# Altium PCB PSU.PcbDoc
Units mm, origin at the board's own origin, x right, y up, seen from the top; angles counter-clockwise.
Board outline 56 x 56 mm, 2 copper layers (Top Layer, Bottom Layer); 46 components, 28 nets, 171 pads, 182 vias.
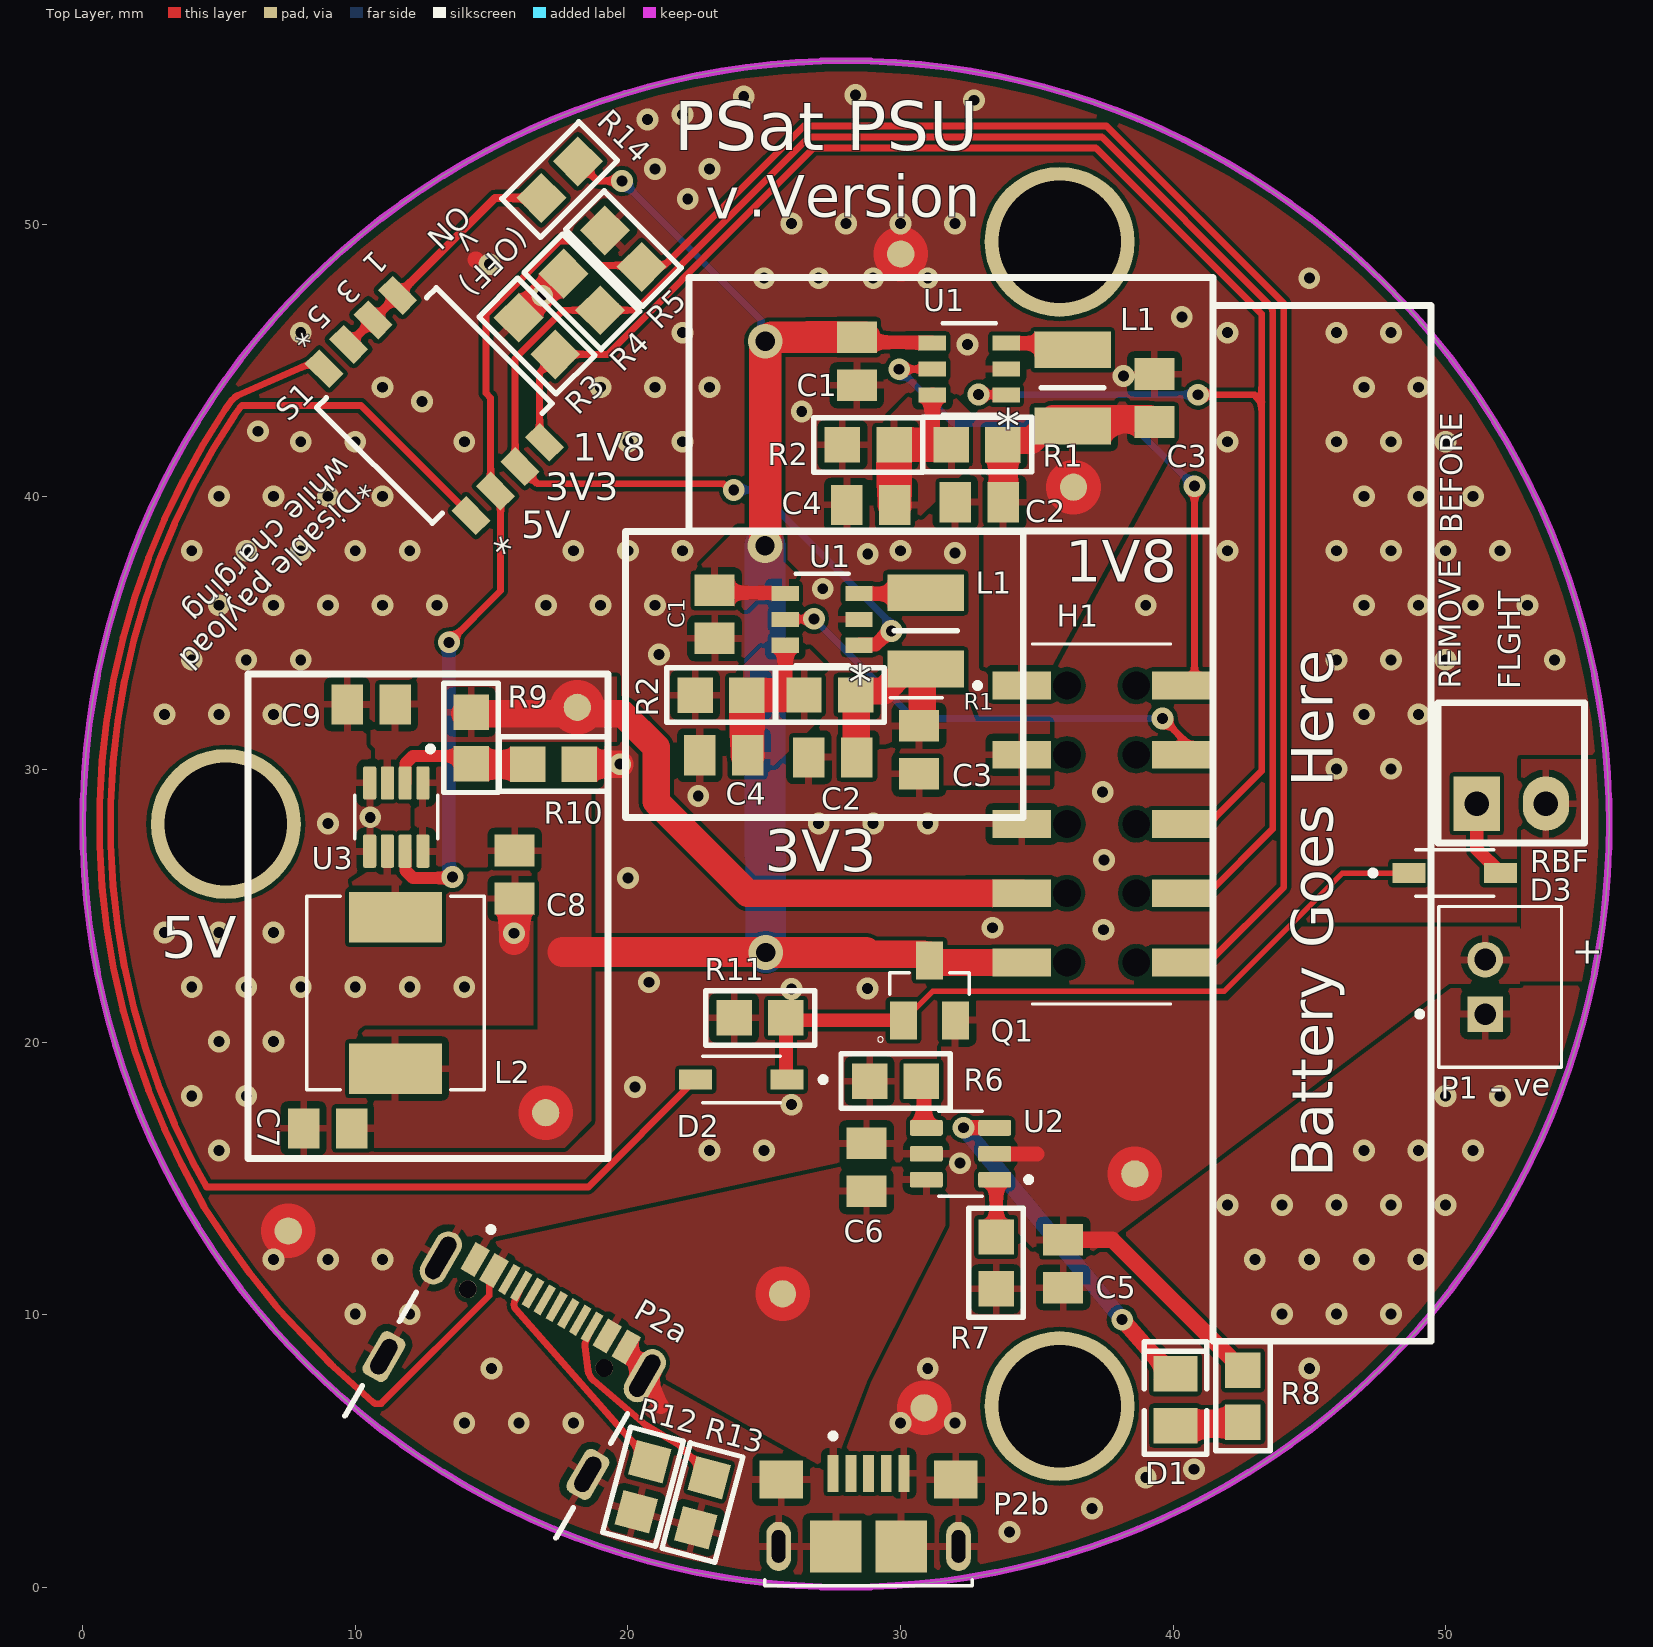
[diagram p0: Top Layer view]
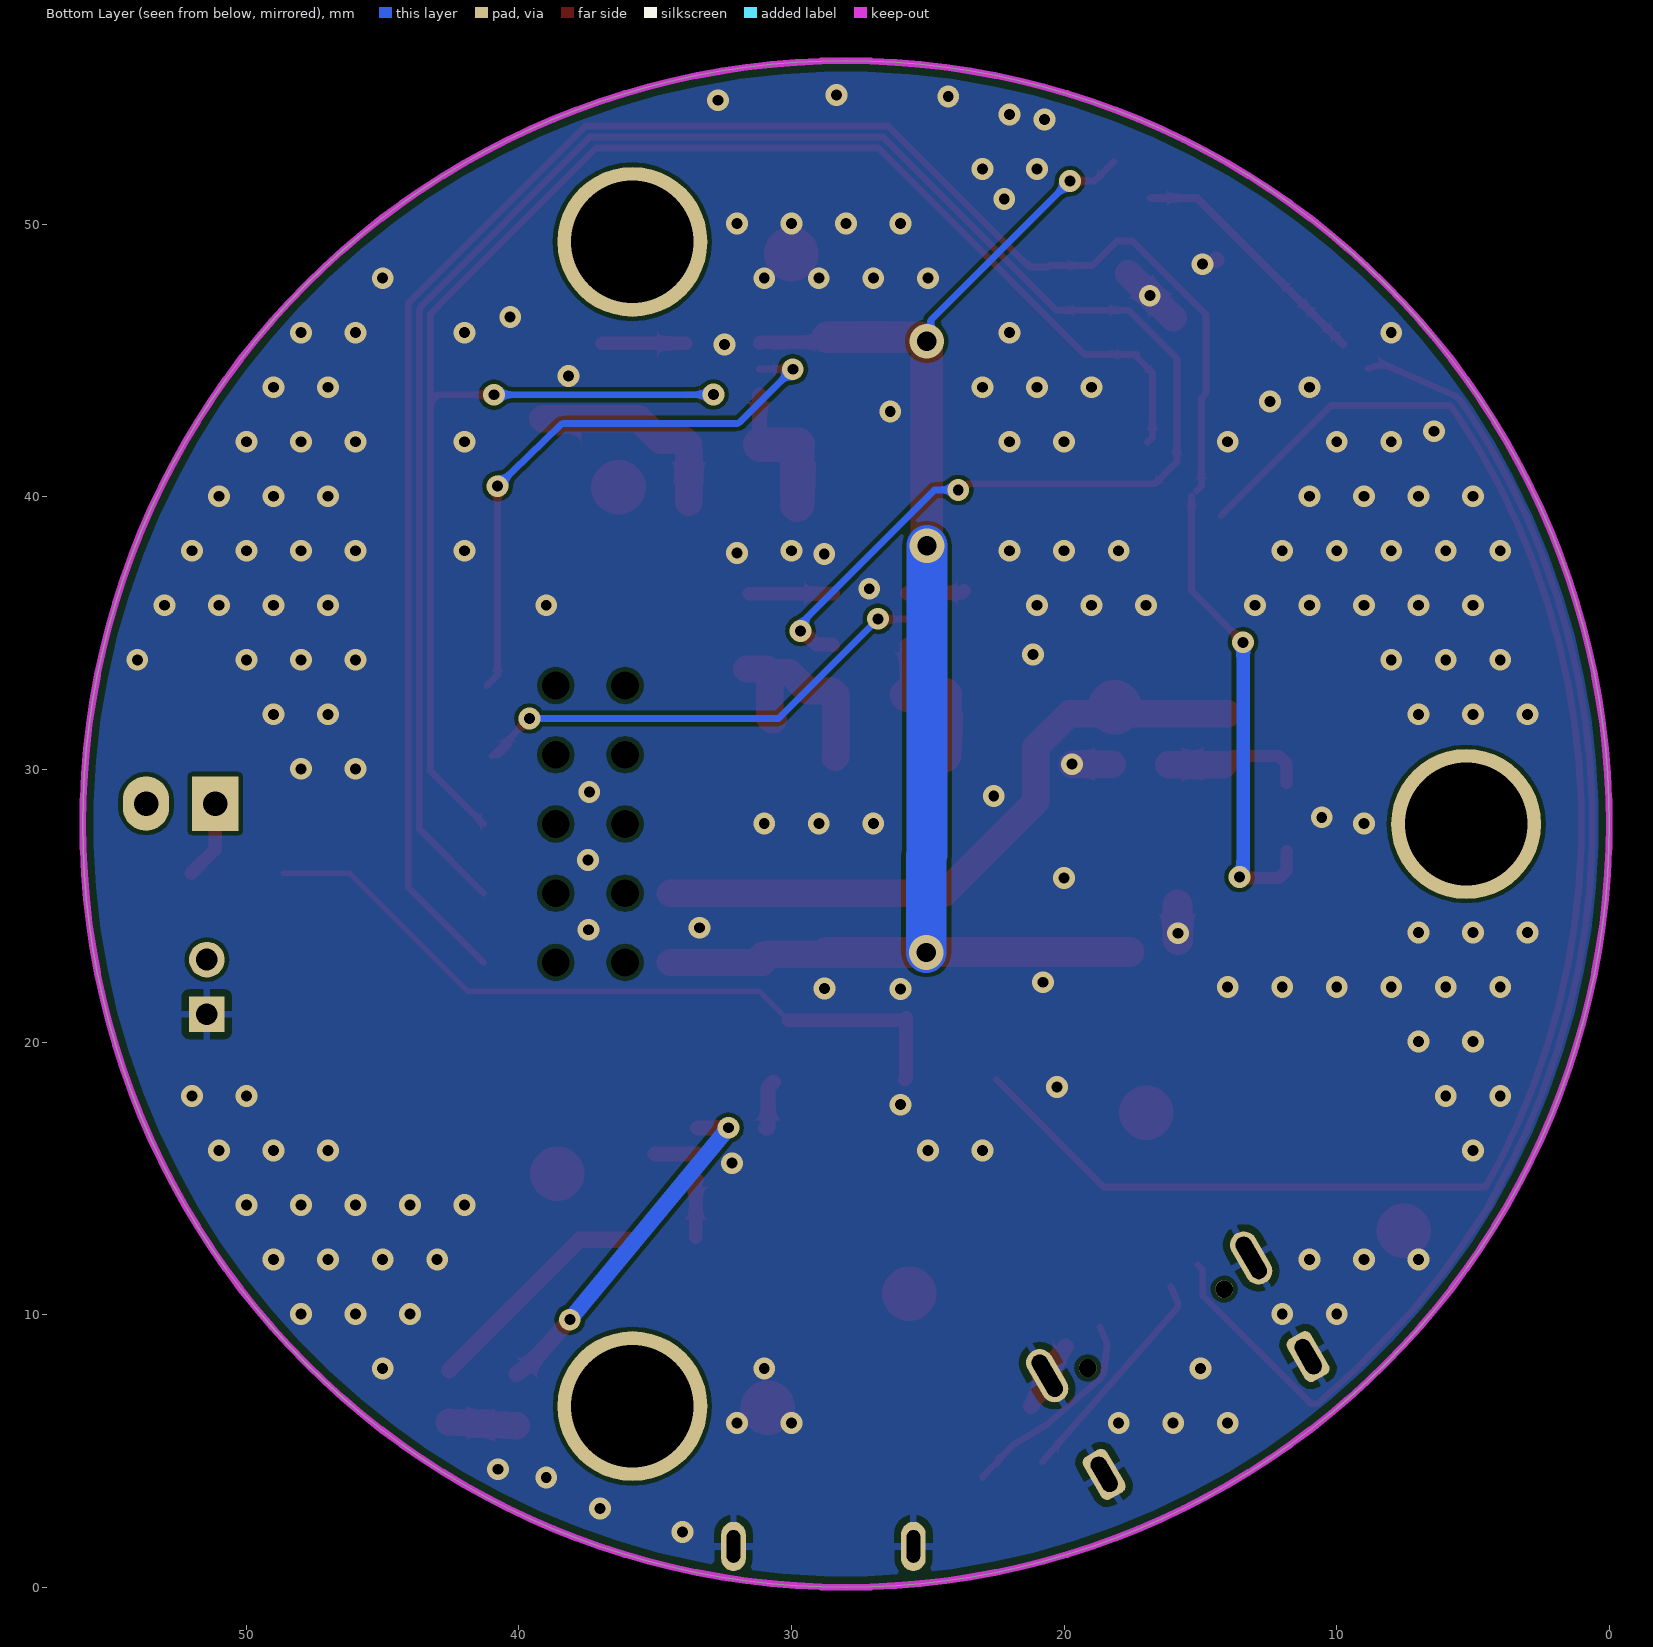
[diagram p1: Bottom Layer view, seen from below]
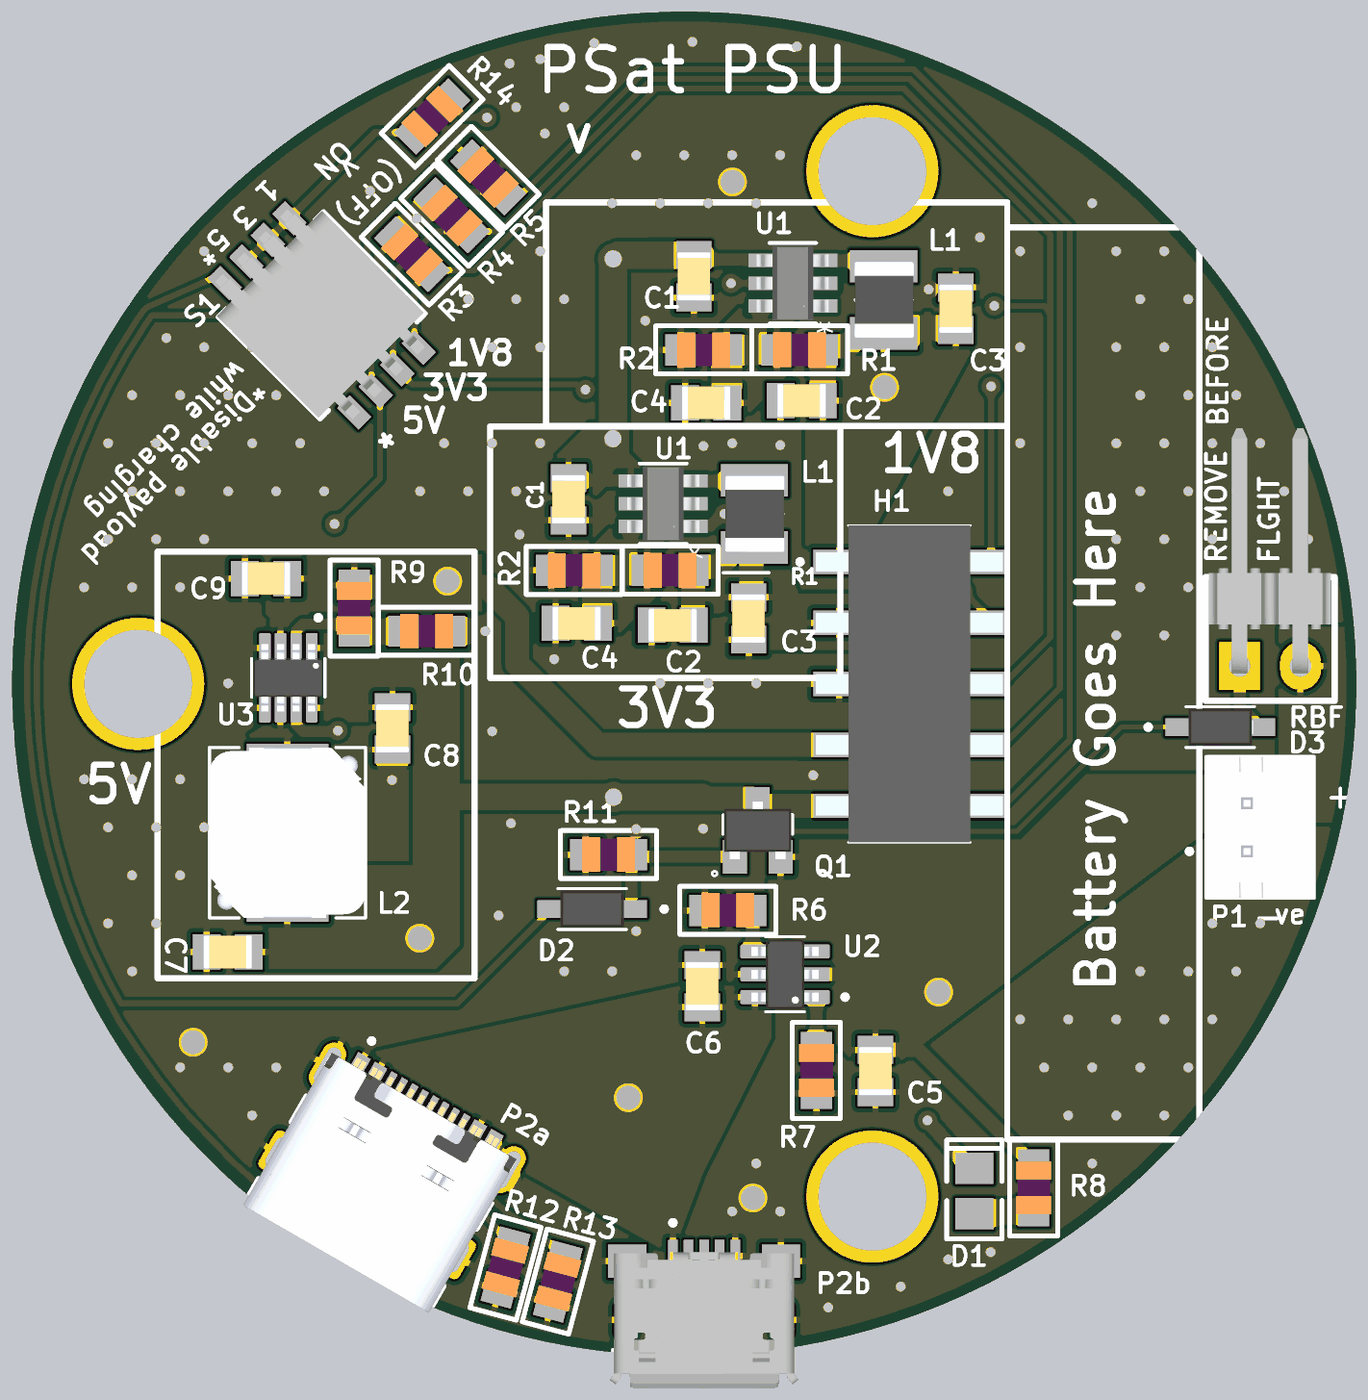
[diagram p2: 3D render of the assembled board from above, using the file's embedded part models]

## Layer stack, top to bottom
Top Solder: solder mask 0.0102, Solder Resist, Dk 3.5
Top Layer: signal copper 0.0356
Dielectric 1: dielectric 0.32, FR-4, Dk 4.8
Bottom Layer: signal copper 0.0356
Bottom Solder: solder mask 0.0102, Solder Resist, Dk 3.5

## Board outline
28,0 cw(c28,28) 0,28 cw(c28,28) 28,56 cw(c28,28) 56,28 cw(c28,28)

## Design rules (kind name [scope] priority, off if disabled: settings)
BoardOutlineClearance [All] p1: gap=0.4 ignorepadtopadclearanceinfootprint=FALSE
Clearance Clearance_1 [All vs InNet('No Net')] p1: gap=0.07 ignorepadtopadclearanceinfootprint=TRUE
Clearance [All] p2: gap=0.152 ignorepadtopadclearanceinfootprint=TRUE except(0: Arc-Hole Track-Hole SMDPad-Hole THPad-Hole Via-Hole Fill-Hole Poly-Hole Region-Hole Text-Hole)
HoleSize [All] p1: absolutevalues=TRUE maxlimit=6 minlimit=0.3 maxpercent=80.000 minpercent=20.000
PolygonConnect ViaDirectConnect [IsVia vs IsPolygon] p1: connectstyle=Direct reliefconductorwidth=0.254 reliefentries=4 polygonreliefangle="90 Angle" airgapwidth=0.254
PolygonConnect [All] p2: connectstyle=Relief reliefconductorwidth=0.254 reliefentries=4 polygonreliefangle="90 Angle" airgapwidth=0.254
RoutingVias [All] p1: holewidth=0.3 width=0.6 viastyle="Through Hole" minholewidth=0.3 minwidth=0.5 maxholewidth=1 maxwidth=5
SolderMaskExpansion [All] p1: expansion=0.102
Width [All] p1: maxlimit=25.4 minlimit=0.152 preferedwidth=0.152
29 further rules are at their usual default settings.

## Classes and differential pairs
component class Main: D2 D3 H1 P1 P2a P2b Q1 R3 R4 R5 R11 R12 R13 R14 RBF S1
component class 3V3: C1 C2 C3 C4 L1 R1 R2 U1
component class 1V8: C1 C2 C3 C4 L1 R1 R2 U1
channel class "Step-down converter": 1V8 3V3
component class "U_Battery charger": C5 C6 D1 R6 R7 R8 U2
component class 5V: C7 C8 C9 L2 R9 R10 U3

## Components (designator, comment, footprint, x,y, rotation, side; value= is the part's Value field where it differs from the comment)
C1 "22uF" CAPC2012X94N 28.4,44.978 r90 top
C1 "22uF" CAPC2012X94N 23.179,35.692 r90 top
C2 "22uF" CAPC2012X94N 32.891,39.804 r0 top
C2 "22uF" CAPC2012X94N 27.517,30.443 r0 top
C3 "22uF" CAPC2012X94N 39.315,43.627 r270 top
C3 "22uF" CAPC2012X94N 30.681,30.723 r90 top
C4 "22pF" CAPC2012X94N 28.914,39.707 r0 top
C4 "22pF" CAPC2012X94N 23.516,30.522 r0 top
C5 "1uF" CAPC2012X94N 35.966,11.873 r90 top
C6 "1uF" CAPC2012X94N 28.751,15.407 r270 top
C7 "22uF" CAPC2012X94N 8.982,16.834 r0 top
C8 "22uF" CAPC2012X94N 15.845,26.147 r270 top
C9 "22uF" CAPC2012X94N 10.578,32.391 r0 top
D1 "LTST-C170KGKT" ECE-LED2012-0805SM 40.086,6.877 r90 top
D2 "1N5819HW-7-F" SOD3715X145N 24.162,18.621 r180 top
D3 "1N5819HW-7-F" SOD3715X145N 50.33,26.2 r0 top
H1 "RS2BE-10-G-SMT" RS2BE10GSMT 37.377,28 r270 top
L1 "DFE322520F-2R2M=P2" INDC3225X200N 36.313,44 r90 top
L1 "DFE322520F-2R2M=P2" INDC3225X200N 30.923,35.082 r90 top
L2 "SPM6530T-1R5M100" IND_SPM6530T-1R5M100 11.472,21.8 r90 top
P1 "B2B-PH-K-S(LF)(SN)" JST_B2B-PH-K-S(LF)(SN) 51.997,22.024 r270 top
P2a "USB4105-GF-A" GCT_USB4105-GF-A 14.789,6.302 r330 top
P2b "10118193-0001LF" AMPHENOL_10118193-0001LF 28.827,1.5 r0 top
Q1 "SSM3J328R,LF" SOT95P240X88-3N 31.063,21.896 r0 top
R1 "200k" 0805 32.807,41.917 r0 top
R1 "910k" 0805 27.41,32.732 r0 top
R2 "100k" 0805 28.814,41.911 r0 top
R2 "200k" 0805 23.416,32.726 r0 top
R3 "1Meg" 0805 16.663,45.901 r135 top value=100k
R4 "1Meg" 0805 18.309,47.52 r135 top value=100k
R5 "1Meg" 0805 19.831,49.106 r135 top value=100k
R6 "560" 0805 29.817,18.565 r0 top
R7 "10k" 0805 33.508,11.899 r90 top
R8 "1.5k" 0805 42.561,7.007 r90 top
R9 "910k" 0805 14.248,31.156 r90 top
R10 "100k" 0805 17.272,30.195 r180 top value=910k
R11 "1Meg" 0805 24.847,20.889 r0 top value=10k
R12 "5k1" 0805 20.554,3.688 r255 top value=100k
R13 "5k1" 0805 22.734,3.104 r75 top value=100k
R14 "1.5k" 0805 17.494,51.637 r225 top
RBF "" ECE-600102STTH-RA 51.139,28.748 r90 top
S1 "TDP04H1SBD1" TDP04H1SBD1 12.899,43.352 r225 top
U1 "AP3445LW6-7" SOT26_AP3445_DIO 32.521,44.691 r180 top
U1 "AP3445LW6-7" SOT26_AP3445_DIO 27.124,35.506 r180 top
U2 "BQ21040DBVR" SOT95P280X145-6N 32.201,15.902 r180 top
U3 "RT4812GJ8F" SOT65P279X100-8N 11.502,28.255 r270 top

## Footprints (in the part's own frame and the unit in brackets; to place one, negate y for a bottom-side part, rotate by r counter-clockwise, add the part's x,y. Pads: shape width x height; smd on the part's side, far side on the other; paste and mask are expansions set on the pad)
0805 [mm]
  rect 1.3x1.3 smd: 1(-0.95,0) 2(0.95,0)
  silkscreen extent -2,-1 2,1, body extent -1.1,-0.72 1.1,0.73, height 1.1
AMPHENOL_10118193-0001LF [mm]
  rect 0.4x1.35 smd: 1(-1.3,2.675) 2(-0.65,2.675) 3(0,2.675) 4(0.65,2.675) 5(1.3,2.675)
  rect 1.6x1.4 smd: S1(-3.2,2.45) S2(3.2,2.45)
  rect 1.9x1.9 smd: S3(1.2,0) S4(-1.2,0)
  oval 0.9x1.8 hole 0.5 slot 1.2 at 90 deg: S5(-3.3,0) S6(3.3,0)
  silkscreen extent -3.8,-1.45 3.8,4.15, body extent -3.94,-2.83 3.93,2.83, height 2.85
CAPC2012X94N [mm]
  rect 1.16x1.47 smd: 1(-0.88,0) 2(0.88,0)
  body extent -1.02,-0.7 1.02,0.7, height 1.23
ECE-600102STTH-RA [mm] "Polarised Header 2 way"
  rect 2x1.7 hole 0.9: 1(0,0)
  oval 2x1.7 hole 0.9: 2(0,-2.54)
  silkscreen extent -1.45,-3.96 3.7,1.42, body extent -0.31,-3.8 9.91,1.28, height 1.9
ECE-LED2012-0805SM [mm] "RED AS AlGaAs SMD LED, Body; 2mm x 1.25 mm (LxW)"
  rect 1.3x1.6 smd: 1(-0.95,0) 2(0.95,0)
  silkscreen extent -2,-1.15 2.13,1.15
GCT_USB4105-GF-A [mm]
  rect 0.6x1.15 smd: A1_B12(-3.2,4.755) A4_B9(-2.4,4.755) B1_A12(3.2,4.755) B4_A9(2.4,4.755)
  rect 0.3x1.15 smd: A5(-1.25,4.755) A6(-0.25,4.755) A7(0.25,4.755) A8(1.25,4.755) B5(1.75,4.755) B6(0.75,4.755) B7(-0.75,4.755) B8(-1.75,4.755)
  oval 1x2.1 hole 0.6 slot 1.7 at 90 deg: SH1(-4.32,4.18) SH2(4.32,4.18)
  rrect50% 1x1.8 hole 0.6 slot 1.4 at 90 deg: SH3(-4.32,0) SH4(4.32,0)
  round 0.65 hole 0.65 unplated: ""(-2.89,3.68) ""(2.89,3.68)
  silkscreen extent -4.47,-2.6 4.47,6.1, body extent -4.47,-2.6 4.47,5.11, height 3.31
IND_SPM6530T-1R5M100 [mm]
  rect 1.85x3.4 smd: 1(-2.775,0) 2(2.775,0)
  silkscreen extent -3.55,-3.25 3.55,3.25, body extent -3.55,-3.25 3.55,3.25, height 3
INDC3225X200N [mm]
  rect 1.35x2.8 smd: 1(-1.4,0) 2(1.4,0)
  silkscreen extent 0,-1.15 0,1.15, body extent -1.6,-1.27 1.6,1.23, height 2
JST_B2B-PH-K-S(LF)(SN) [mm]
  rect 1.308x1.308 hole 0.8: 1(1,-0.55)
  round 1.308 hole 0.8: 2(-1,-0.55)
  silkscreen extent -2.95,-3.05 2.95,2.25, body extent -2.95,-2.25 2.95,2.25, height 6
RS2BE10GSMT [mm]
  rect 1.02x2.15 smd: 1(-5.08,-2.925) 2(-5.08,2.925) 3(-2.54,-2.925) 4(-2.54,2.925) 5(0,-2.925) 6(0,2.925) 7(2.54,-2.925) 8(2.54,2.925) 9(5.08,-2.925) 10(5.08,2.925)
  round 0.51 hole 1.02 unplated: MH1(-5.08,-1.27) MH2(-5.08,1.27) MH3(-2.54,1.27) MH4(-2.54,-1.27) MH5(0,-1.27) MH6(0,1.27) MH7(2.54,1.27) MH8(2.54,-1.27) MH9(5.08,-1.27) MH10(5.08,1.27)
  silkscreen extent -6.6,-4.6 6.6,2.54, body extent -6.6,-3.9 6.6,3.9, height 5.15
SOD3715X145N [mm]
  rect 1.21x0.73 smd: A(1.68,0) C(-1.68,0)
  silkscreen extent -3.1,-0.85 1.43,0.85, body extent -1.83,-0.77 1.83,0.77, height 0.8
SOT26_AP3445_DIO [mil]
  rect 39.5x22 smd paste+0 mask+0: 1(-53.25,37.4) 2(-53.25,0) 3(-53.25,-37.4) 4(53.25,-37.4) 5(53.25,0) 6(53.25,37.4)
  silkscreen extent -39,-66 39,66, body extent -59,-61 59,61, height 55
SOT65P279X100-8N [mm]
  rrect25% 1.22x0.48 smd: 1(-1.25,0.975) 2(-1.25,0.325) 3(-1.25,-0.325) 4(-1.25,-0.975) 5(1.25,-0.975) 6(1.25,-0.325) 7(1.25,0.325) 8(1.25,0.975)
  silkscreen extent -2.6,-1.53 0.8,1.53, body extent -1.4,-1.45 1.4,1.45, height 1
SOT95P240X88-3N [mm]
  rect 1x1.4 smd: 1(-0.95,-1.1) 2(0.95,-1.1) 3(0,1.1)
  silkscreen extent -1.9,-1.9 1.45,0.65, body extent -1.4,-1.2 1.4,1.2, height 0.88
SOT95P280X145-6N [mm]
  rrect25% 1.21x0.58 smd: 1(-1.255,0.95) 2(-1.255,0) 3(-1.255,-0.95) 4(1.255,-0.95) 5(1.255,0) 6(1.255,0.95)
  silkscreen extent -2.6,-1.56 0.8,1.56, body extent -1.4,-1.45 1.4,1.45, height 1.45
TDP04H1SBD1 [mm]
  rect 0.76x1.27 smd: 1(-1.905,-3.81) 2(-0.635,-3.81) 3(0.635,-3.81) 4(1.905,-3.81) 5(1.905,3.81) 6(0.635,3.81) 7(-0.635,3.81) 8(-1.905,3.81)
  silkscreen extent -3.11,-3 3.11,3, body extent -3.08,-4.14 3.12,3.98, height 4.36

## Part data
C1 C1 C2 C2 C3 C3 C4 C4 C5 C6 C7 C8 C9: library part "CAP 0805", "No Description Available", IsInLabBook=Yes
D1: library part LED, "LED"
D2 D3: "Diode Schottky 40 V 1A Surface Mount SOD-123", Package="SOD-123 Fairchild Semiconductor", Availability="In Stock", Check_prices=https://www.snapeda.com/parts/1N5819HW-7-F/Diodes+Inc./view-part/?ref=eda, MF="Diodes Inc.", MP=1N5819HW-7-F, Price=None, Purchase-URL=https://pricing.snapeda.com/search/part/1N5819HW-7-F/?ref=eda, SnapEDA_Link=https://www.snapeda.com/parts/1N5819HW-7-F/Diodes+Inc./view-part/?ref=snap
H1: "Receptacle Strip 10P 2.54mm Pitch SMT", Manufacturer_Name="Adam Tech", Geometry.Height=5.05mm, Manufacturer_Part_Number=RS2BE-10-G-SMT
L1 L1: "2.2 H Shielded Wirewound Inductor 3.3 A 40mOhm Max 1210 (3225 Metric)", Manufacturer_Name="Murata Electronics", Manufacturer_Part_Number=DFE322520F-2R2M=P2, Datasheet Link=https://www.murata.com/-/media/webrenewal/support/library/catalog/products/inductor/chip/o05e.ashx?la=en-us, Geometry.Height=2mm
L2: "1.5 µH Shielded Drum Core, Wirewound Inductor 11 A 10.67mOhm Max Nonstandard", Package="NON STANDARD-2 TDK", Check_prices=https://www.snapeda.com/parts/SPM6530T-1R5M100/TDK/view-part/?ref=eda, Digi-Key_Part_Number=445-3881-2-ND, MF=TDK, MP=SPM6530T-1R5M100, Purchase-URL=https://pricing.snapeda.com/search/part/SPM6530T-1R5M100/?ref=eda, SnapEDA_Link=https://www.snapeda.com/parts/SPM6530T-1R5M100/TDK/view-part/?ref=snap
P1: "Connector Header Through Hole 2 position 0.079 (2.00mm)", Package=None, Check_prices=https://www.snapeda.com/parts/B2B-PH-K-S%20(LF)(SN)/JST/view-part/?ref=eda, MF=JST, MP="B2B-PH-K-S (LF)(SN)", SnapEDA_Link=https://www.snapeda.com/parts/B2B-PH-K-S%20(LF)(SN)/JST/view-part/?ref=snap
P2a: "USB-C (USB TYPE-C) USB 2.0 Receptacle Connector 24 (16+8 Dummy) Position Surface Mount, Right Angle; Through Hole", Package=None, Check_prices=https://www.snapeda.com/parts/USB4105-GF-A/Global+Connector+Technology/view-part/?ref=eda, MF=GCT, MP=USB4105-GF-A, SnapEDA_Link=https://www.snapeda.com/parts/USB4105-GF-A/Global+Connector+Technology/view-part/?ref=snap
P2b: "Micro USB 2.0, Input Output Connectors, B TYPE RECEPTACLE", Package=None, Availability="In Stock", Check_prices=https://www.snapeda.com/parts/10118193-0001LF/Amphenol+FCI/view-part/?ref=eda, MF="Amphenol ICC", MP=10118193-0001LF, Price=None, Purchase-URL=https://pricing.snapeda.com/search/part/10118193-0001LF/?ref=eda, SnapEDA_Link=https://www.snapeda.com/parts/10118193-0001LF/Amphenol+FCI/view-part/?ref=snap
Q1: "P-Channel 20V 6A _Ta_ 1W _Ta_ Surface Mount SOT-23F", Package="SOT-23 Toshiba", Availability=Unavailable, MF=Toshiba, MP=SSM3J328R,LF, Price=None, SnapEDA_Link=https://www.snapeda.com/parts/SSM3J328R,LF/Toshiba%20Semiconductor%20and%20Storage/view-part/214715/?ref=snap
R1 R1 R2 R2 R3 R4 R5 R6 R7 R8 R9 R10 R11 R12 R13 R14: library part "Res 0805", "Resistor"
  R1 R1 R2 R2 R9 R10: IsInLabBook=Check
  R3 R4 R5 R6 R7 R8 R11 R12 R13 R14: IsInLabBook=Yes
RBF: library part "Header 2", "Short Before Flight"
S1: "Switch", Manufacturer_Name="C & K COMPONENTS", Mouser Part Number=611-TDP04H1SBD1, Arrow Part Number=TDP04H1SBD1, Arrow Price/Stock=https://www.arrow.com/en/products/tdp04h1sbd1/ck?region=nac, Datasheet Link=https://www.ckswitches.com/media/1330/tdp.pdf, Height=4.4mm, Manufacturer_Part_Number=TDP04H1SBD1, Mouser Price/Stock=https://www.mouser.co.uk/ProductDetail/CK/TDP04H1SBD1?qs=LUL%252B3%2F1oFk7o6Dk5%252BAVXHw%3D%3D
U1 U1: "No Description Available", Mfr_Name="Diodes Inc", Copyright="Copyright (C) 2024 Ultra Librarian. All rights reserved.", Manufacturer_Part_Number=AP3445LW6-7, RefDes=RefDes, Type=DEV
U2: "1-cell, 0.8-A Li-ion and Li-polymer battery charger", Package="SOT-23-6 Texas Instruments", Availability="In Stock", Check_prices=https://www.snapeda.com/parts/BQ21040DBVR/Texas+Instruments/view-part/?ref=eda, MF="Texas Instruments", MP=BQ21040DBVR, Price=None, Purchase-URL=https://pricing.snapeda.com/search/part/BQ21040DBVR/?ref=eda, SnapEDA_Link=https://www.snapeda.com/parts/BQ21040DBVR/Texas+Instruments/view-part/?ref=snap
U3: "Boost Switching Regulator IC Positive Adjustable 1.8V 1 Output 2A SOT-23-8 Thin, TSOT-23-8", Package="TSOT-23 Richtek", Availability=Unavailable, DigiKey-Purchase-URL=https://snapeda.com/shop?store=DigiKey&id=699858, MF="Richtek USA", MP=RT4812GJ8F, Price=None, SnapEDA_Link=https://www.snapeda.com/parts/RT4812GJ8F/Richtek%20USA%20Inc./view-part/699858/?ref=snap

## Free pads (board coordinates)
  round 5.5 hole 4.5: 1(5.25,28) 1(35.837,6.643) 1(35.837,49.357)
  round 1 smd: 2(7.539,13.071) 2(16.983,17.408) 2(18.143,32.278) 2(25.672,10.763) 2(30.009,48.91) 2(30.863,6.584) 2(36.345,40.354) 2(38.597,15.163)

## Via types
v1: diameter 0.8, hole 0.4, Top Layer to Bottom Layer, tented both sides, 158 vias
v2: diameter 0.8, hole 0.4, Top Layer to Bottom Layer, tented bottom, 21 vias
v3: diameter 1.27, hole 0.711, Top Layer to Bottom Layer, tented bottom, 3 vias

## Nets (pads, with @x,y where several pads share a name; then routed paths per layer and width w, separated by ;. In a path a pad name is that pad's centre, name@x,y a point inside that pad or via, vN(x,y) a via of type N, cw(c..) or ccw(c..) an arc to the next point about the centre after c; other vN are vias at no path point)
1V8: C2.2@33.771,39.804 C3.2@39.315,42.747 H1.1 L1.1@36.313,42.6 pad.2@36.345,40.354 R1.2@33.757,41.917 | length 7.9
  Top Layer w1: C2.2@33.771,39.804 33.764,39.81 33.764,41.91 33.757,41.917 33.907,42.067 34.795,42.067 35.596,42.867 36.321,42.867 36.323,42.865 39.131,42.865 C3.2@39.133,42.863
1V8_PG: H1.2 U1.5@31.169,44.691 | length 21.3
  Top Layer w0.25: v2(29.951,44.684) 29.955,44.687 31.165,44.687 U1.5@31.169,44.691 ; v2(40.785,40.393) 40.785,33.465 H1.2@41.17,33.08
  Bottom Layer w0.25: v2(29.951,44.684) 31.87,42.765 ccw(c32.047,42.942) 32.047,42.692 38.324,42.692 cw(c38.324,42.442) 38.499,42.621 v2(40.785,40.393)
3V3: C2.2@28.397,30.443 C3.2@30.681,31.603 H1.3 L1.1@30.923,33.682 R1.2@28.36,32.732 | length 7.8
  Top Layer w1: C2.2@28.397,30.443 28.379,30.462 28.379,32.75 28.51,32.882 29.398,32.882 30.073,33.557 L1.1@30.798,33.557 ; C3.2@30.673,31.814 30.718,31.814 30.798,31.894 L1.1@30.798,33.557 ; L1.1@31.648,33.682 30.923,33.682 L1.1@30.798,33.557
3V3_PG: H1.4 U1.5@25.771,35.506 | length 18.1
  Top Layer w0.25: U1.5@25.771,35.506 25.781,35.516 26.816,35.516 v2(26.827,35.527) ; v2(39.61,31.875) H1.4@40.944,30.54 ; H1.4@40.352,30.925 40.737,30.54 H1.4@40.944,30.54 ; H1.4@40.982,30.502 H1.4@40.944,30.54
  Bottom Layer w0.25: v2(26.827,35.527) 30.479,31.875 v2(39.61,31.875)
5V: C9.2 H1.7 pad.2@18.143,32.278 R9.2 U3.3 | length 24.3
  Top Layer w1: R9.2@14.007,32.047 19.801,32.047 21.037,30.812 21.037,28.821 24.398,25.46 H1.7
EN_1V8: H1.6 R3.1 S1.8 U1.1@33.874,43.741 | length 66.2
  Top Layer w0.25: S1.8 16.76,42.186 16.76,44.561 17.334,45.136 R3.1 19.243,45.229 24.677,50.664 26.815,52.801 37.164,52.801 42.617,47.348 43.25,46.715 43.25,43.481 ; v2(32.86,43.755) 32.867,43.748 33.867,43.748 U1.1@33.874,43.741 ; v2(40.917,43.746) 42.985,43.746 43.007,43.724 43.25,43.481 ; H1.6@41.302,28 43.25,29.948 43.25,33.045 43.25,43.481
  Bottom Layer w0.25: v2(32.86,43.755) v2(40.917,43.746)
EN_3V3: H1.8 R4.1 S1.7 U1.1@28.476,34.556 | length 77.6
  Top Layer w0.25: v2(23.881,40.257) 23.732,40.257 23.51,40.479 16.67,40.479 S1.7 15.862,41.288 15.862,45.073 17.637,46.848 R4.1 20.292,46.848 26.648,53.204 37.384,53.204 43.522,47.066 cw(c43.205,46.749) 43.653,46.749 43.653,27.811 H1.8@41.302,25.46
  Top Layer w0.5: U1.1@28.476,34.556 28.506,34.586 29.095,34.586 29.592,35.082 v2(29.673,35.082)
  Bottom Layer w0.25: v2(23.881,40.257) 24.749,40.257 v2@29.616,35.39
EN_5V: H1.10 R5.1 S1.6 U3.7 | length 85
  Top Layer w0.25: v2(13.431,34.664) 15.324,36.557 S1.6@15.324,40.029 ; S1.6 14.964,40.39 14.964,43.634 14.794,43.804 14.794,46.688 17.495,49.388 18.06,49.388 18.957,48.492 20.534,48.492 20.591,48.435 21.245,48.435 21.302,48.492 21.338,48.492 22.92,50.074 23.926,51.08 26.452,53.606 37.553,53.606 44.062,47.097 44.062,25.68 H1.10@41.302,22.92
  Top Layer w0.45: U3.7 11.842,26.99 11.842,26.291 12.116,26.017 13.534,26.017 v2(13.57,26.053)
  Bottom Layer w0.5: v2(13.431,34.664) 13.431,26.272 13.57,26.134 v2(13.57,26.053)
FB_1V8: C4.2@29.794,39.707 R1.1@31.857,41.917 R2.2@29.764,41.911 U1.6@31.169,43.741 | length 5.4
  Top Layer w0.5: 31.158,41.914 31.169,41.924
  Top Layer w0.55: 31.169,41.924 U1.6@31.169,43.741
  Top Layer w1.25: C4.2@29.794,39.707 29.779,39.721 29.779,41.896 29.764,41.911 29.767,41.914 31.158,41.914
FB_3V3: C4.2@24.396,30.522 R1.1@26.46,32.732 R2.2@24.366,32.726 U1.6@25.771,34.556 | length 5.4
  Top Layer w0.5: 25.761,32.729 25.771,32.739
  Top Layer w0.55: 25.771,32.739 U1.6@25.771,34.556
  Top Layer w1.25: C4.2@24.396,30.522 24.381,30.537 24.381,32.711 24.366,32.726 24.369,32.729 25.761,32.729
GND: C1.1 C2.1 C3.1 C4.1 C5.1 C6.1 C7.1 C8.2 C9.1 H1.5 P1.1 P2a.A1_B12 P2a.B1_A12 P2a.SH1 P2a.SH2 P2a.SH3 P2a.SH4 P2b.5 P2b.S1 P2b.S2 P2b.S3 P2b.S4 P2b.S5 P2b.S6 pad.2@7.539,13.071 pad.2@30.009,48.91 pad.2@30.863,6.584 R2.1 R3.2 R4.2 R5.2 R6.1 R7.1 R10.1 R11.1 R12.2 R13.1 U1.2 U2.5 U3.4 U3.5 | length 7.6
  Top Layer w0.6: 14.411,48.704 14.424,48.704 ; P2a.B1_A12 P2a.SH2 21.212,6.653
  Top Layer w1: R3.2 16.005,46.573 17.623,48.191 R4.2 ; R10.1 v1(19.707,30.195)
  Top Layer w1.1: v1@15.816,23.752 15.831,23.767 15.831,25.024 C8.2@15.848,25.04
  other v1: 33.997,2.024 37.019,2.894 38.997,4.024 40.768,4.329 13.997,6.024 15.997,6.024 17.997,6.024 29.997,6.024 31.997,6.024 14.997,8.024 30.997,8.024 44.997,8.024 9.997,10.024 11.997,10.024 43.997,10.024 45.997,10.024 47.997,10.024 6.997,12.024 8.997,12.024 10.997,12.024 42.997,12.024 44.997,12.024 46.997,12.024 48.997,12.024 41.997,14.024 43.997,14.024 45.997,14.024 47.997,14.024 49.997,14.024 4.997,16.024 22.997,16.024 24.997,16.024 46.997,16.024 48.997,16.024 50.997,16.024 25.997,17.704 3.997,18.024 5.997,18.024 49.997,18.024 51.997,18.024 20.263,18.353 4.997,20.024 6.997,20.024 25.997,21.95 28.786,21.968 3.997,22.024 5.997,22.024 7.997,22.024 9.997,22.024 11.997,22.024 13.997,22.024 20.778,22.193 15.823,23.993 2.997,24.024 4.997,24.024 6.997,24.024 33.372,24.194 19.997,26.024 8.997,28.024 26.997,28.024 28.997,28.024 30.997,28.024 22.58,29.028 45.997,30.024 47.997,30.024 2.997,32.024 4.997,32.024 6.997,32.024 46.997,32.024 48.997,32.024 3.997,34.024 5.997,34.024 7.997,34.024 45.997,34.024 47.997,34.024 49.997,34.024 53.997,34.024 21.137,34.219 4.997,36.024 6.997,36.024 8.997,36.024 10.997,36.024 12.997,36.024 16.997,36.024 18.997,36.024 20.997,36.024 38.997,36.024 46.997,36.024 48.997,36.024 50.997,36.024 52.997,36.024 28.798,37.908 31.999,37.946 3.997,38.024 5.997,38.024 7.997,38.024 9.997,38.024 11.997,38.024 17.997,38.024 19.997,38.024 21.997,38.024 29.997,38.024 41.997,38.024 45.997,38.024 47.997,38.024 49.997,38.024 51.997,38.024 4.997,40.024 6.997,40.024 8.997,40.024 10.997,40.024 46.997,40.024 48.997,40.024 50.997,40.024 7.997,42.024 9.997,42.024 13.997,42.024 19.997,42.024 21.997,42.024 41.997,42.024 45.997,42.024 47.997,42.024 49.997,42.024 6.425,42.409 26.375,43.13 10.997,44.024 18.997,44.024 20.997,44.024 22.997,44.024 46.997,44.024 48.997,44.024 38.182,44.432 7.997,46.024 21.997,46.024 41.997,46.024 45.997,46.024 47.997,46.024 40.319,46.599 24.997,48.024 26.997,48.024 28.997,48.024 30.997,48.024 44.997,48.024 14.917,48.538 25.997,50.024 27.997,50.024 29.997,50.024 31.997,50.024 22.194,50.924 20.997,52.024 22.997,52.024 20.722,53.841 21.997,54.024 32.699,54.552 24.248,54.691 28.343,54.743
  other v2: 32.185,15.558 37.445,24.121 37.46,26.684 10.547,28.245 37.416,29.171 27.147,36.631 12.447,43.498 32.458,45.592 16.854,47.382
NetC6_2: C6.2 P2a.A4_B9 P2a.B4_A9 P2b.1 pad.2@25.672,10.763 S1.4 U2.6 | length 51.6
  Top Layer w0.25: S1.4 8.317,44.88 5.684,43.721 ccw(c5.846,43.352) 5.562,43.637 5.474,43.549 ccw(c5.758,43.264) 5.43,43.497 5.237,43.225 5.235,43.223 5.23,43.215 4.412,41.914 3.669,40.57 3.666,40.563 3.003,39.186 3,39.179 2.415,37.766 1.908,36.316 1.482,34.84 1.14,33.343 0.883,31.828 0.711,30.302 0.625,28.768 0.625,27.232 0.711,25.698 0.883,24.172 1.14,22.657 1.482,21.16 1.908,19.684 2.415,18.234 3,16.821 3.003,16.814 3.624,15.511 4.458,13.939 5.234,12.78 6.118,11.532 7.076,10.331 7.44,9.924 9.117,8.17 9.191,8.095 10.66,6.782 10.733,6.729 10.94,6.729 11.004,6.792 14.913,10.701 14.913,11.645 P2a.A4_B9@15.088,11.82
NetD1_1: D1.1 R8.1 | length 2.5
  Top Layer w1: D1.1 R8.1
NetD1_2: D1.2 U2.3 | length 13.1
  Top Layer w0.55: v2@32.315,16.854 U2.3@33.455,16.854
  Top Layer w0.6: v2(32.313,16.856) v2@32.315,16.854 ; v2(38.132,9.816) 39.586,8.177 D1.2
  Bottom Layer w0.6: v2(32.313,16.856) v2(38.132,9.816)
NetD2_A: D2.A S1.5 | length 59.9
  Top Layer w0.25: S1.5 10.278,43.279 10.205,43.352 5.846,43.352 5.758,43.264 5.564,42.991 4.875,41.895 4.759,41.71 4.027,40.385 3.37,39.021 2.791,37.623 2.291,36.194 1.872,34.74 1.535,33.264 1.282,31.772 1.112,30.268 1.027,28.757 1.027,27.243 1.112,25.732 1.282,24.228 1.535,22.736 1.872,21.26 2.291,19.806 2.791,18.377 3.37,16.979 4.027,15.615 4.539,14.688 18.549,14.688 D2.A
NetD2_C: D2.C D3.C Q1.1 R11.2 | length 27.4
  Top Layer w0.2: Q1.1 31.182,21.864 41.873,21.864 46.209,26.2 D3.C
  Top Layer w0.5: D2.C 25.797,18.666 R11.2 25.891,20.796 Q1.1
NetD3_A: D3.A RBF.1 | length 2.9
  Top Layer w0.5: RBF.1 51.139,27.071 D3.A
NetL1_1V8_2: L1.2@36.313,45.4 U1.3@33.874,45.641 | length 3.1
  Top Layer w0.5: U1.3@33.874,45.641 33.879,45.636 36.946,45.636 L1.2@36.951,45.631
NetL1_3V3_2: L1.2@30.923,36.482 U1.3@28.476,36.456 | length 3.1
  Top Layer w0.5: U1.3@28.476,36.456 28.481,36.451 31.548,36.451 L1.2@31.553,36.446
NetL2_2: L2.2 U3.6
NetP2a_A5: P2a.A5 R12.1 | length 8.4
  Top Layer w0.25: P2a.A5 15.844,10.48 ccw(c16.099,10.372) 15.891,10.189 R12.1
NetP2a_B5: P2a.B5 R13.2 | length 7.7
  Top Layer w0.25: P2a.B5 18.442,8.981 ccw(c18.697,8.872) 18.422,8.837 18.534,7.967 ccw(c19.132,8.044) 18.741,7.586 20.65,5.956 20.652,5.954 ccw(c20.812,6.146) 20.685,5.931 21.847,5.239 21.876,5.222 22.981,4.068 R13.2
NetR6_2: R6.2 U2.4 | length 1.9
  Top Layer w0.5: R6.2@30.66,18.538 R6.2@30.664,18.542
  Top Layer w0.55: R6.2@30.66,18.538 30.857,18.341 30.857,16.867 30.872,16.852 U2.4
NetR7_2: R7.2 U2.1 | length 2.1
  Top Layer w0.5: U2.1 33.468,14.952 33.508,14.912 R7.2
NetR9_1: R9.1 R10.2 U3.2 | length 5.3
  Top Layer w0.45: U3.2 11.842,29.52 11.842,30.218 12.116,30.492 13.838,30.492 R9.1@14.157,30.173
  Top Layer w1: R9.1@14.157,30.173 R10.2@16.162,30.173
NetR14_2: R14.2 S1.1 S1.2 S1.3 | length 9.3
  Top Layer w0.3: S1.3 15.124,50.966 R14.2
Vbat: C5.2 P1.2 pad.2@38.597,15.163 Q1.2 R8.2 RBF.2 U2.2 | length 10.1
  Top Layer w0.55: U2.2 35.007,15.902
  Top Layer w0.6: C5.2 37.765,12.753 R8.2
Vraw: C1.2 C7.2 C8.1 H1.9 L2.1 pad.2@16.983,17.408 Q1.3 R14.1 U1.4 U3.1 U3.8 | length 65.4
  Top Layer w0.25: R14.1 18.884,51.591 v1(19.782,51.591)
  Top Layer w0.5: C1.2@23.663,36.561 23.739,36.486 25.742,36.486 U1.4@25.771,36.456 ; C1.2@28.683,45.861 28.874,45.67 31.139,45.67 U1.4@31.169,45.641
  Top Layer w1: v3(25.039,45.704) 25.112,45.704 v3@25.268,45.861 ; 28.735,23.295 28.692,23.252 28.659,23.285 v3(25.058,23.285) 25.058,23.252 25.091,23.219 30.84,23.219 30.863,23.196 31.063,23.196 Q1.3 31.063,22.92 H1.9
  Top Layer w1.1: 17.6,23.295 28.735,23.295
  Top Layer w1.15: v3@25.268,45.861 C1.2@28.683,45.861
  Top Layer w1.2: v3(25.029,38.214) 25.034,38.219 25.034,45.699 v3(25.039,45.704)
  Bottom Layer w0.25: v1(19.782,51.591) 24.89,46.483 24.89,45.853 v3(25.039,45.704)
  Bottom Layer w1.5: v3(25.029,38.214) 25.029,26.875 25.058,26.846 v3(25.058,23.285)
pads on no net: H1.MH1 H1.MH2 H1.MH3 H1.MH4 H1.MH5 H1.MH6 H1.MH7 H1.MH8 H1.MH9 H1.MH10 P2a. P2a.A6 P2a.A7 P2a.A8 P2a.B6 P2a.B7 P2a.B8 P2b.2 P2b.3 P2b.4

## Polygon pours and split planes (outlines as drawn)
GND on Top Layer "GND_L01_P018" (solid, remove dead copper, pour order 18): 0,40.083 15.865,55.947 39.705,56.384 56.475,39.613 56.44,16.508 39.933,0 15.688,0 0,15.688
Vbat on Top Layer "VBAT_L01_P013" (solid, pour order 13): 50.333,24.163 52.768,24.163 52.768,30.382 56,30.382 56,22.223 50.333,22.226
Vbat on Top Layer "VBAT_L01_P008" (solid, pour order 8): 31.496,21.519 42.013,21.519 44.727,24.233 52.725,24.233 52.725,22.135 50.135,22.135 36.852,12.157 35.15,12.157 31.496,15.812
NetC6_2 on Top Layer "NETC6_2_L01_P009" (solid, pour order 9): 31.64,15.43 31.64,13.262 28.791,7.634 27.831,5.084 27.831,3.967 27.26,3.967 27.26,4.349 14.512,11.43 15.06,12.676 27.831,15.43
NetL2_2 on Top Layer "NETL2_2_L01_P006" (solid, pour order 6): 10.733,26.438 9.774,25.822 9.774,23.667 13.161,23.667 13.161,25.515 11.547,26.975 11.46,27.684 11.011,27.684
Vraw on Top Layer "VRAW_L01_P005" (solid, pour order 5): 12.182,26.41 16.687,26.41 16.687,20.453 10.364,20.453 9.229,19.318 9.229,16.125 17.678,16.125 18.66,17.107 18.66,29.208 13.326,29.208 13.327,30.213 12.182,30.213
Vraw on Top Layer "VRAW_L01_P010" (solid, pour order 10): 24.027,38.863 22.26,37.096 22.26,36.148 22.593,35.815 24.319,35.815 24.706,36.202 26.273,36.202 26.273,37.056 25.698,37.63 25.698,38.876
1V8 on Top Layer "1V8_L01_P000" (solid, pour order 0): 37.724,43.506 37.734,43.497 40.145,43.497 40.145,42.178 35.545,33.752 35.545,32.274 33.368,32.274 33.044,32.598 33.044,42.658 34.012,42.658 34.87,43.516 34.88,43.506 37.704,43.506
FB_1V8 on Top Layer "FB_1V8_L01_P002" (solid, pour order 2): 30.67,43.985 30.608,43.985 29.127,42.504 29.176,42.455 29.176,38.978 30.364,38.978 30.388,38.953 32.653,41.218 32.653,43.013 31.671,43.995
FB_3V3 on Top Layer "FB_3V3_L01_P004" (solid, pour order 4): 25.272,34.8 25.211,34.8 23.729,33.319 23.778,33.27 23.778,29.793 24.966,29.793 24.99,29.768 27.255,32.033 27.255,33.828 26.273,34.81
5V on Top Layer "5V_L01_P007" (solid, pour order 7): 10.981,29.055 10.734,29.302 10.734,30.752 10.561,30.925 10.561,33.404 19.581,33.404 19.581,31.025 12.457,31.025 11.568,30.135 11.568,29.044
3V3 on Top Layer "3V3_L01_P003" (solid, remove dead copper, pour order 3): 32.763,31.764 35.474,31.764 35.474,29.416 31.115,29.416 29.572,30.959 29.542,30.929 28.684,30.929 27.627,31.987 27.647,32.007 27.647,34.341 31.822,34.341
GND on Bottom Layer "GND_L02_P016" (solid, remove dead copper, pour order 16): 0,57.48 1.358,58.838 57.08,58.838 57.08,1.699 55.381,0 0,0

## Keep-outs
Keep-Out Layer:
  the board outline again, w0.25

## Silkscreen, mask and mechanical layers (free items; w line width, h text height)
Top Overlay:
  lines w0.127: 29.622,32.629 31.533,32.629
  lines w0.254: 6.06,15.735 6.06,33.51 19.263,33.51 19.263,15.735 6.06,15.735 ; 19.913,28.246 19.913,38.724 34.504,38.724 34.504,28.246 19.913,28.246 ; 22.242,38.744 22.242,48.055 41.46,48.055 41.46,38.744 22.242,38.744 ; 41.46,9.025 41.46,47.025 49.46,47.025 49.46,9.025 41.46,9.025
  text "PSat PSU" at 21.704,52.721 h1.8
  text "ON" at 13.766,50.749 h0.8 r225
  text ".Version" at 24.413,50.276 h1.52
  text "v" at 22.857,50.206 h1.52
  text "(OFF)" at 15.874,49.942 h0.8 r225
  text ">" at 14.653,49.348 h0.8 r135
  text "1" at 10.691,49.109 h0.8 r225
  text "3" at 9.708,48.036 h0.8 r225
  text "5" at 8.625,47.106 h0.8 r225
  text "*" at 7.501,45.538 h0.8 r315
  text "while charging" at 9.352,41.59 h0.8 r225
  text "1V8" at 17.985,41.318 h1
  text "*Disable payload" at 10.127,40.783 h0.8 r225
  text "3V3" at 16.969,39.872 h1
  text "BEFORE" at 50.609,38.658 h0.8 r90
  text "5V" at 16.095,38.491 h1
  text "*" at 14.663,37.953 h1 r315
  text "1V8" at 36.035,36.884 h1.52
  text "REMOVE" at 50.545,32.956 h0.8 r90
  text "FLGHT" at 52.743,32.949 h0.8 r90
  text "3V3" at 25.021,26.274 h1.52
  text "5V" at 2.884,23.096 h1.52
  text "+" at 54.619,22.872 h1
  text "ve" at 52.493,18.032 h0.8
  text "-" at 51.616,17.846 h1
  text "Battery Goes Here" at 45.865,15.038 h1.52 r90

## Text inside footprints (layer, text, board x,y; h text height)
P2a: Mechanical 13 "PCB EDGE" at 17.776,1.873 h0.41 r330
P2b: Mechanical 13 "PCB END" at 33.677,0.3 h0.41
U1: Top Overlay "*" at 34.386,43.77 h1.27 r180; Mechanical 13 "*" at 33.309,44.488 h1.27 r180
U1: Top Overlay "*" at 28.96,34.376 h1.27 r180; Mechanical 13 "*" at 27.911,35.303 h1.27 r180